# EAGLE board u (EAGLE 7.2.0)
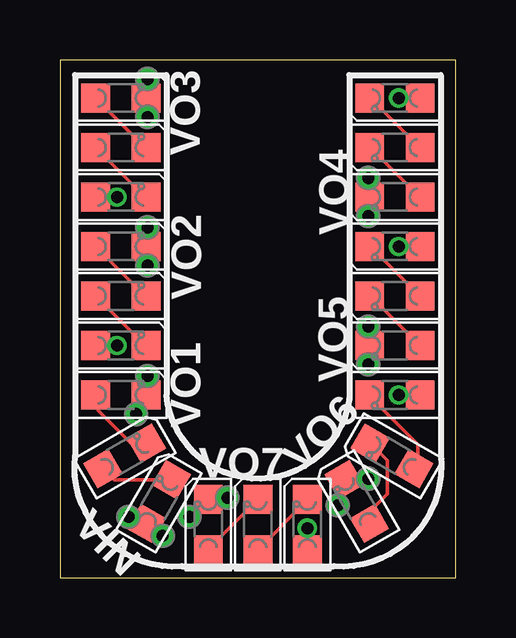
[diagram p0: board, top side]
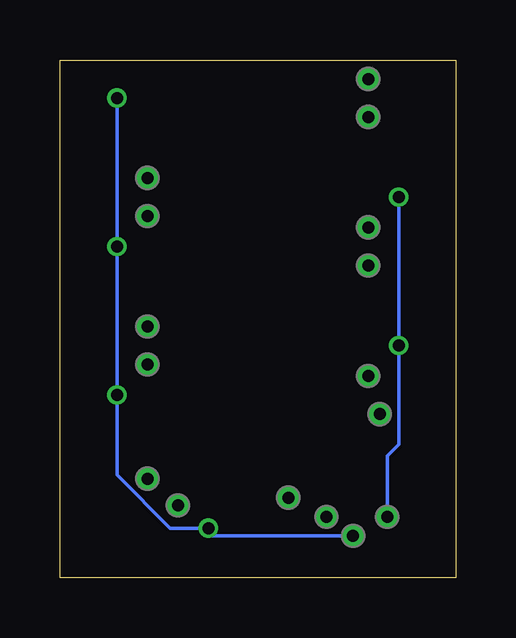
[diagram p1: board, bottom side, seen from below]

Size 16.51 x 21.59 mm. Coordinates in mm from the lower left corner, seen from the top.
Outline: 0,0 16.51,0 16.51,21.59 0,21.59 0,0
Copper layers (1*16): Top 0.035mm / dielectric 1.5mm / Bottom 0.035mm
Design rules "Fusion_eagle_rule_v1.1_tms *": minimum track width 6mil, minimum drill 12mil, track to track 6mil, track to pad 6mil, pad to pad 6mil, via to via 6mil, smd to smd 0mil, copper to edge 10mil, drill to drill 10mil, minimum pad ring 10mil, minimum via ring 6mil, stop-mask expansion 2mil, vias tented up to drill 100mil, thermal gap 10mil

## Footprints (pad centres in the part's own frame; a part is rotated, then mirrored left to right if it is on the bottom)
LED_0805 = smd 1.2 x 1.2: A 0,-1.05; C 0,1.05
P1-20 = drill 0.5: TP 0,0

## Placement (x,y rotation side)
LED1  [LED_0805]  4.13,3.17 330 top
LED2  [LED_0805]  2.7,5.08 300 top
LED3  [LED_0805]  2.54,7.62 270 top
LED4  [LED_0805]  2.54,9.68 270 top
LED5  [LED_0805]  2.54,11.75 270 top
LED6  [LED_0805]  2.54,13.81 270 top
LED7  [LED_0805]  2.54,15.88 270 top
LED8  [LED_0805]  2.54,17.94 270 top
LED9  [LED_0805]  2.54,20 270 top
LED10  [LED_0805]  13.97,20 90 top
LED11  [LED_0805]  13.97,17.94 90 top
LED12  [LED_0805]  13.97,15.88 90 top
LED13  [LED_0805]  13.97,13.81 90 top
LED14  [LED_0805]  13.97,11.75 90 top
LED15  [LED_0805]  13.97,9.68 90 top
LED16  [LED_0805]  13.97,7.62 90 top
LED17  [LED_0805]  13.85,5.08 60 top
LED18  [LED_0805]  12.38,3.17 30 top
LED19  [LED_0805]  10.32,2.22 0 top
LED20  [LED_0805]  8.26,2.22 0 top
LED21  [LED_0805]  6.19,2.22 0 top
VIN  [P1-20]  2.86,2.54 0 top
VIN1  [P1-20]  4.29,1.75 0 top
VO1  [P1-20]  3.65,8.41 0 top
VO2  [P1-20]  3.65,13.02 0 top
VO3  [P1-20]  3.65,19.21 0 top
VO4  [P1-20]  12.86,16.67 0 top
VO5  [P1-20]  12.86,8.89 0 top
VO6  [P1-20]  11.59,3.02 0 top
VO7  [P1-20]  5.4,2.54 0 top
VO8  [P1-20]  3.17,6.83 0 top
VO9  [P1-20]  3.65,14.61 0 top
VO10  [P1-20]  3.65,20.8 0 top
VO11  [P1-20]  12.86,15.08 0 top
VO12  [P1-20]  12.86,10.48 0 top
VO13  [P1-20]  12.86,4.13 0 top
VO14  [P1-20]  6.99,3.33 0 top

## Library data of the parts
LED1-LED21 VIN VIN1 VO1-VO14 = CyberRailGuru

## Nets
N$3: LED2.C LED3.A
N$4: LED1.C LED2.A
N$7: LED5.C LED6.A
N$8: LED4.C LED5.A
N$11: LED8.C LED9.A
N$12: LED7.C LED8.A
N$15: LED11.C LED12.A
N$16: LED10.C LED11.A
N$19: LED14.C LED15.A
N$20: LED13.C LED14.A
N$23: LED17.C LED18.A
N$24: LED16.C LED17.A
N$27: LED20.C LED21.A
N$28: LED19.C LED20.A
VIN: LED1.A LED4.A LED7.A LED10.A LED13.A LED16.A LED19.A VIN1.TP VIN.TP
VOUT1: LED3.C VO1.TP VO8.TP
VOUT2: LED6.C VO2.TP VO9.TP
VOUT3: LED9.C VO3.TP VO10.TP
VOUT4: LED12.C VO4.TP VO11.TP
VOUT5: LED15.C VO5.TP VO12.TP
VOUT6: LED18.C VO6.TP VO13.TP
VOUT7: LED21.C VO7.TP VO14.TP

## Tracks (layer width: path | path; a pad name or v marks a point on that pad's centre or on a via)
N$3
  Top 0.152: LED2.C 2.97,5.61 1.59,6.99 1.59,7.52 LED3.A
N$4
  Top 0.152: LED1.C 2.26,4.08 LED2.A
N$7
  Top 0.152: LED5.C 3.55,11.75 LED6.A
N$8
  Top 0.152: LED4.C 3.55,9.68 LED5.A
N$11
  Top 0.152: LED8.C 3.55,17.94 LED9.A
N$12
  Top 0.152: LED7.C 3.55,15.88 LED8.A
N$15
  Top 0.152: LED11.C 12.96,17.94 LED12.A
N$16
  Top 0.152: LED10.C 12.96,20 LED11.A
N$19
  Top 0.152: LED14.C 12.96,11.75 LED15.A
N$20
  Top 0.152: LED13.C 12.96,13.81 LED14.A
N$23
  Top 0.152: LED18.A 12.91,2.75 13.65,3.49 13.65,4.9 LED17.C
N$24
  Top 0.152: LED16.C 12.92,7.56 14.92,5.56 14.92,4.71 LED17.A
N$27
  Top 0.152: LED21.A 6.19,1.21 LED20.C
N$28
  Top 0.152: LED19.C 10.32,3.24 LED20.A
VIN  (via drill 0.5)
  Top 0.152: VIN.TP 3.13,2.27 LED1.A 3.77,2.27 VIN1.TP | LED7.A v2.38,15.88 | v2.38,9.68 LED4.A | v10.32,2.06 LED19.A | v14.13,7.62 LED16.A 15.02,7.84 | LED10.A v14.13,20 | v14.13,13.81 LED13.A
  Bottom 0.152: v2.38,15.88 v2.38,9.68 2.38,5.56 2.86,5.08 VIN.TP | VIN1.TP 10.32,1.75 v10.32,2.06 11.91,2.06 14.13,4.29 v14.13,7.62 v14.13,13.81 v14.13,20
VOUT1
  Top 0.152: VO8.TP 3.17,7.21 LED3.C 3.65,7.68 VO1.TP
VOUT2
  Top 0.152: VO9.TP 3.65,13.87 LED6.C 3.65,13.75 VO2.TP
VOUT3
  Top 0.152: VO10.TP 3.65,20.06 LED9.C 3.65,19.94 VO3.TP
VOUT4
  Top 0.152: VO4.TP 12.86,15.94 LED12.C 12.86,15.81 VO11.TP
VOUT5
  Top 0.152: VO5.TP 12.86,9.62 LED15.C 12.86,9.74 VO12.TP
VOUT6
  Top 0.152: VO6.TP 11.59,3.82 LED18.C 11.9,4.13 VO13.TP
VOUT7
  Top 0.152: VO7.TP 5.46,2.54 LED21.C 6.92,3.27 VO14.TP

## Text on the board
201bmp: U